# EAGLE board INA169_Breakout (EAGLE 6.5.0)
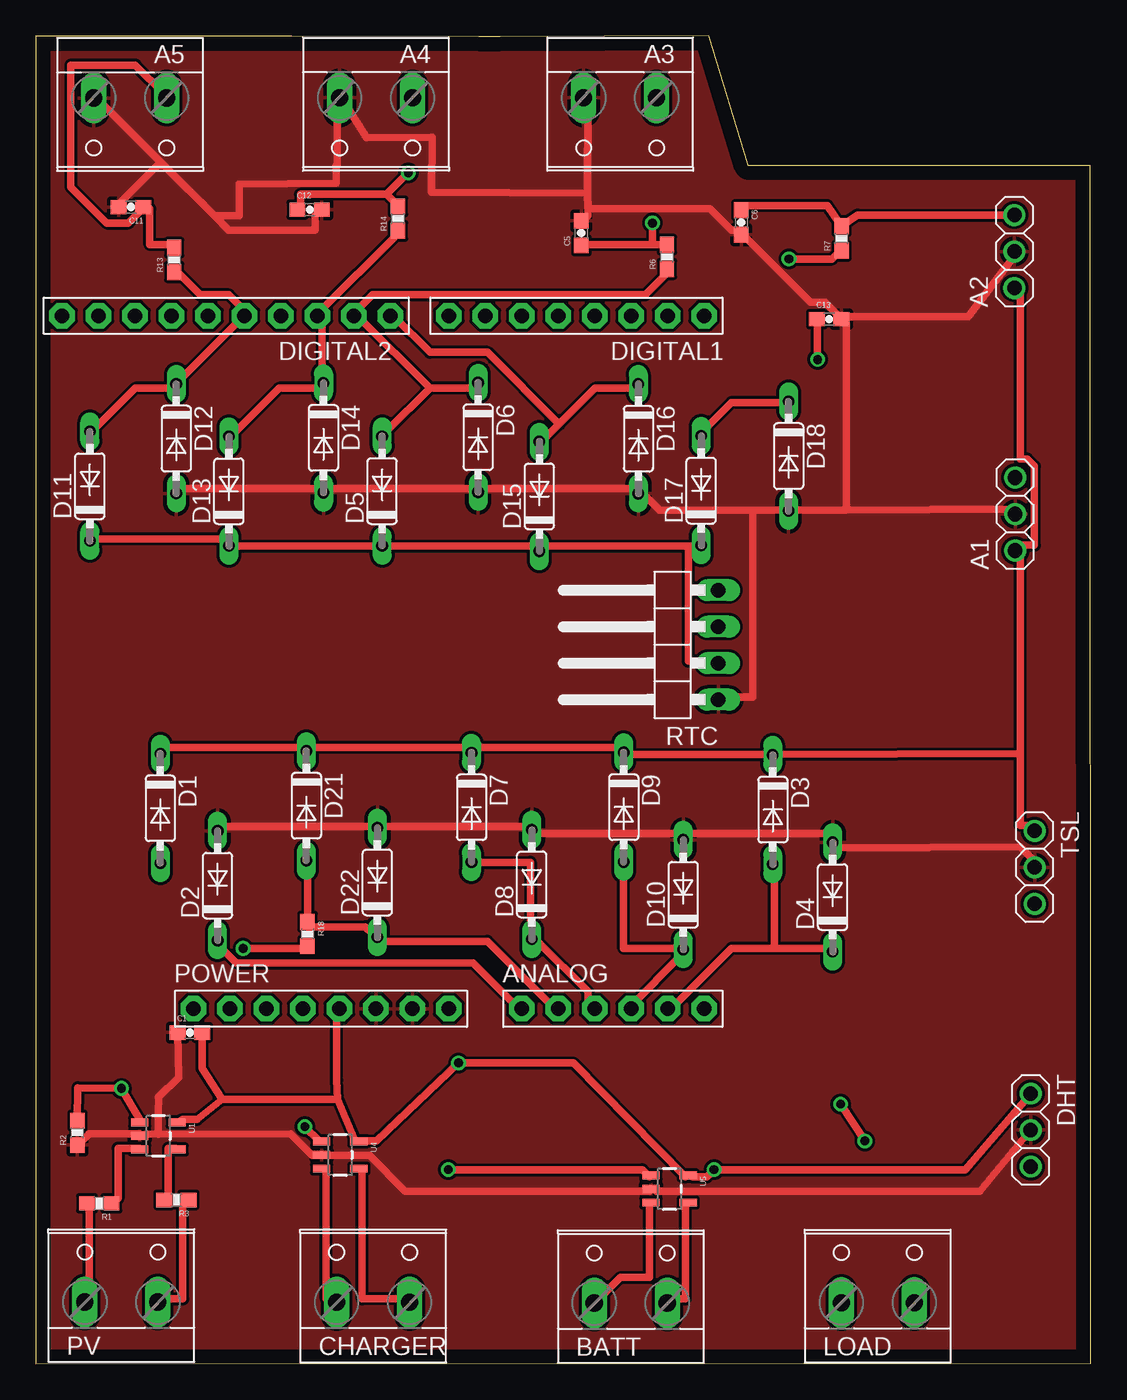
[diagram p0: board, top side]
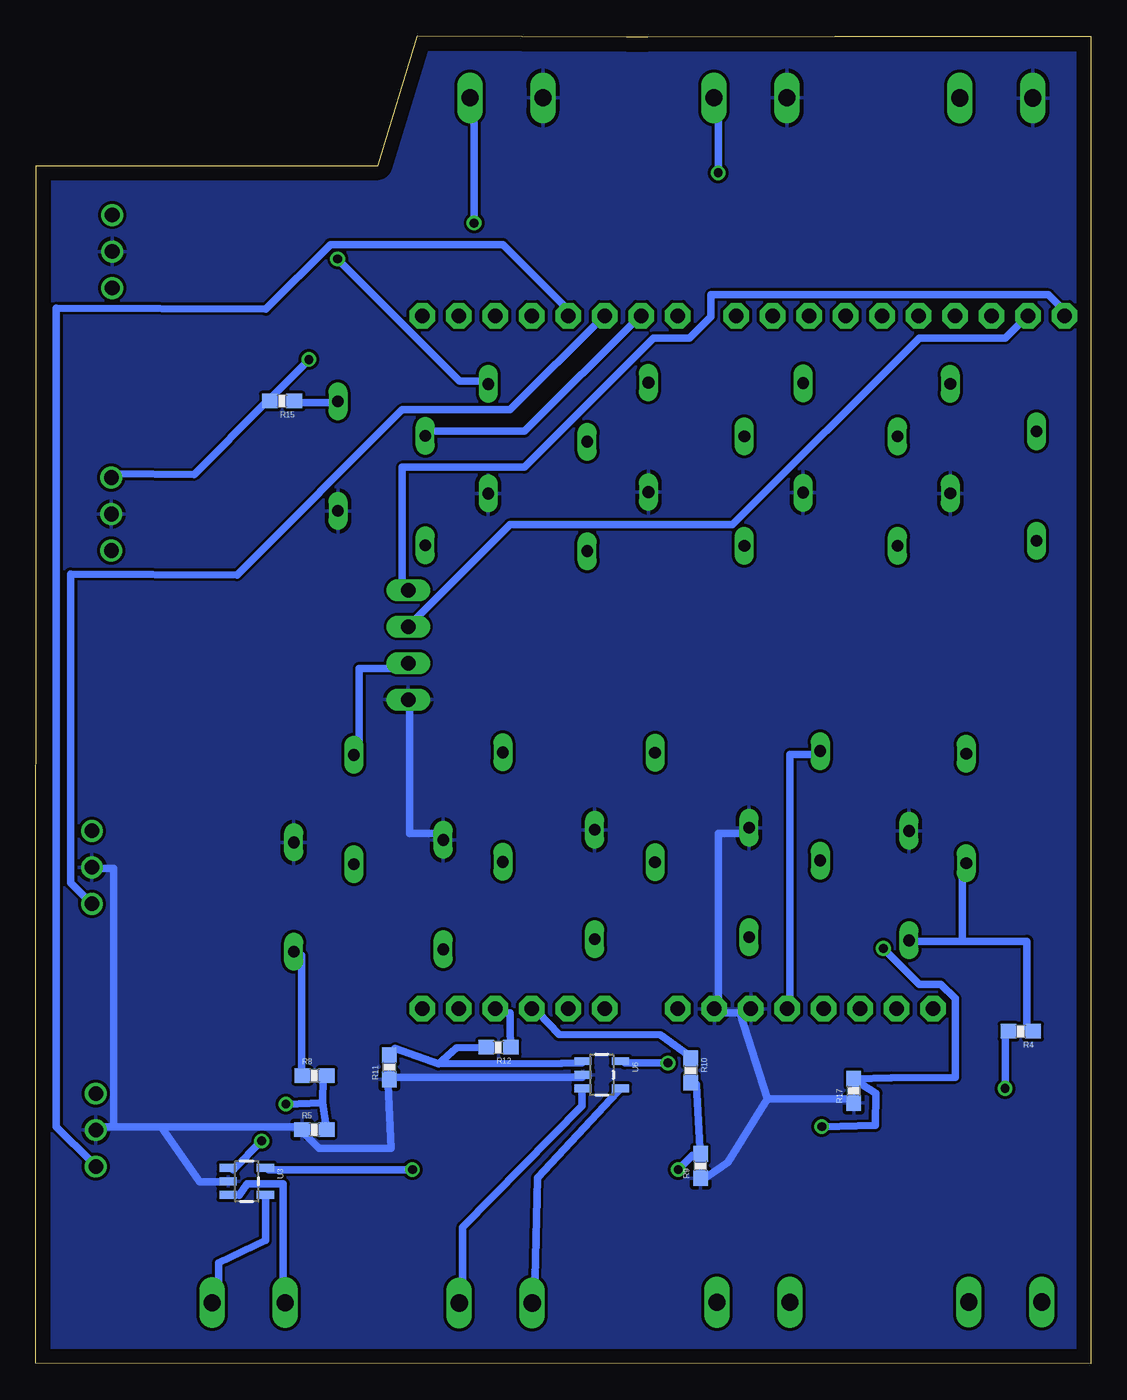
[diagram p1: board, bottom side, seen from below]

Size 73.44 x 92.44 mm. Coordinates in mm from the lower left corner, seen from the top.
Outline: 0,0 73.44,0.02 73.43,83.41 49.63,83.42 46.87,92.44 32.32,92.39 30.83,92.39 17.81,92.41 17.2,92.42 12.67,92.41 11.9,92.42 0,92.4 0,0
Copper layers (1*16): Top 0.035mm / dielectric 1.5mm / Bottom 0.035mm
Design rules "default *": minimum track width 20mil, minimum drill 24mil, track to track 8mil, track to pad 8mil, pad to pad 8mil, via to via 8mil, smd to smd 8mil, copper to edge 40mil, drill to drill 8mil, minimum pad ring 10mil, minimum via ring 8mil, stop-mask expansion 4mil, vias tented up to drill 0mil, thermal gap 10mil

## Footprints (pad centres in the part's own frame; a part is rotated, then mirrored left to right if it is on the bottom)
1X03 = drill 1.016: 1 -2.54,0; 2 0,0; 3 2.54,0
W237-132 = drill 1.194 long: 1 -2.54,-0.635; 2 2.54,-0.635
1X06-BIG = drill 1.016 pad 1.778 octagon: 1 -6.35,0; 2 -3.81,0; 3 -1.27,0; 4 1.27,0; 5 3.81,0; 6 6.35,0
0603-CAP = smd 1.1 x 1: 1 -0.85,0; 2 0.85,0
DO35-7 = drill 0.813 long: A 3.81,0; C -3.81,0
1X08-BIG = drill 1.016 pad 1.778 octagon: 1 -8.89,0; 2 -6.35,0; 3 -3.81,0; 4 -1.27,0; 5 1.27,0; 6 3.81,0; 7 6.35,0; 8 8.89,0
1X10-BIG = drill 1.016 pad 1.778 octagon: 1 -11.43,0; 2 -8.89,0; 3 -6.35,0; 4 -3.81,0; 5 -1.27,0; 6 1.27,0; 7 3.81,0; 8 6.35,0; 9 8.89,0; 10 11.43,0
0603-RES = smd 1.1 x 1: 1 -0.85,0; 2 0.85,0
1X04/90 = drill 1.016 long: 1 -3.81,-3.81; 2 -1.27,-3.81; 3 1.27,-3.81; 4 3.81,-3.81
SOT23-5 = smd 0.55 x 1.2: 1 -0.95,-1.3; 2 0,-1.3; 3 0.95,-1.3; 4 0.95,1.3; 5 -0.95,1.3

## Placement (x,y rotation side)
A1  [1X03]  68.19,59.15 90 top
A2  [1X03]  68.13,77.43 90 top
A3  [W237-132]  40.68,87.49 180 top
A4  [W237-132]  23.68,87.49 180 top
A5  [W237-132]  6.56,87.48 180 top
ANALOG  [1X06-BIG]  40.18,24.7 0 top
BATT  [W237-132]  41.42,4.85 0 top
C1  0.1uF  [0603-CAP]  10.72,23.05 0 top
C5  0.1uF  [0603-CAP]  37.98,78.71 90 top
C6  0.1uF  [0603-CAP]  49.11,79.46 270 top
C11  0.1uF  [0603-CAP]  6.61,80.52 180 top
C12  0.1uF  [0603-CAP]  19.06,80.34 0 top
C13  0.1uF  [0603-CAP]  55.23,72.72 0 top
CHARGER  [W237-132]  23.48,4.9 0 top
D1  1N4148DO35-7  [DO35-7]  8.66,38.66 270 top
D2  1N4148DO35-7  [DO35-7]  12.65,33.28 90 top
D3  1N4148DO35-7  [DO35-7]  51.31,38.57 270 top
D4  1N4148DO35-7  [DO35-7]  55.48,32.48 90 top
D5  1N4148DO35-7  [DO35-7]  24.11,60.75 90 top
D6  1N4148DO35-7  [DO35-7]  30.79,64.49 270 top
D7  1N4148DO35-7  [DO35-7]  30.33,38.73 270 top
D8  1N4148DO35-7  [DO35-7]  34.53,33.36 90 top
D9  1N4148DO35-7  [DO35-7]  40.93,38.74 270 top
D10  1N4148DO35-7  [DO35-7]  45.08,32.65 90 top
D11  1N4148DO35-7  [DO35-7]  3.76,61.09 90 top
D12  1N4148DO35-7  [DO35-7]  9.77,64.4 270 top
D13  1N4148DO35-7  [DO35-7]  13.44,60.74 90 top
D14  1N4148DO35-7  [DO35-7]  20.02,64.45 270 top
D15  1N4148DO35-7  [DO35-7]  35.06,60.38 90 top
D16  1N4148DO35-7  [DO35-7]  41.95,64.39 270 top
D17  1N4148DO35-7  [DO35-7]  46.33,60.78 90 top
D18  1N4148DO35-7  [DO35-7]  52.41,63.18 270 top
D21  1N4148DO35-7  [DO35-7]  18.83,38.84 270 top
D22  1N4148DO35-7  [DO35-7]  23.78,33.5 90 top
DHT  [1X03]  69.27,16.26 270 top
DIGITAL1  [1X08-BIG]  37.64,72.96 180 top
DIGITAL2  PINHD-1X10  [1X10-BIG]  13.25,72.96 180 top
LOAD  [W237-132]  58.62,4.88 0 top
POWER  [1X08-BIG]  19.86,24.7 0 top
PV  [W237-132]  5.95,4.92 0 top
R1  2K2  [0603-RES]  4.41,11.16 180 top
R2  [0603-RES]  2.89,16.07 90 top
R3  2K2  [0603-RES]  9.78,11.39 180 top
R4  1K  [0603-RES]  4.86,23.14 180 bottom
R5  [0603-RES]  54.05,16.29 0 bottom
R6  1K  [0603-RES]  43.94,77.06 90 top
R7  1K  [0603-RES]  56.1,78.34 90 top
R8  1K  [0603-RES]  54.04,20.05 0 bottom
R9  [0603-RES]  27.16,13.76 90 bottom
R10  1K  [0603-RES]  27.85,20.41 270 bottom
R11  [0603-RES]  48.82,20.63 90 bottom
R12  1K  [0603-RES]  41.23,22.03 180 bottom
R13  1K  [0603-RES]  9.63,76.85 90 top
R14  1K  [0603-RES]  25.21,79.72 90 top
R15  1K  [0603-RES]  56.3,67.02 180 bottom
R17  [0603-RES]  16.5,18.99 90 bottom
R18  1K  [0603-RES]  18.91,29.91 270 top
RTC  [1X04/90]  43.7,50.04 90 top
TSL  [1X03]  69.54,34.55 270 top
U1  INA169  [SOT23-5]  8.53,15.86 270 top
U3  INA169  [SOT23-5]  58.76,12.69 270 bottom
U4  INA169  [SOT23-5]  21.19,14.53 270 top
U5  INA169  [SOT23-5]  44.12,12.16 270 top
U6  INA169  [SOT23-5]  34.04,20.11 270 bottom

## Library data of the parts
A1 A2 ANALOG DHT DIGITAL1 DIGITAL2 POWER TSL = adafruit
A3-A5 BATT CHARGER LOAD PV = con-wago-508; OC_FARNELL: unknown; OC_NEWARK: unknown
C1 C5 C6 C11-C13 = SparkFun-Passives
D1-D18 D21 D22 = diode
R1-R15 R17 R18 = SparkFun-Resistors; TOL: 1%
RTC = pinhead
U1 U3-U6 = SparkFun-AnalogIC

## Nets
ADC1: A1.3 C13.1 R15.2
ADC2: A2.3 C6.1 R7.2
ADC3: A3.1 C5.1 R6.2
ADC4: A4.1 C12.1 R14.2
ADC5: A5.1 C11.1 R13.2
D1: DHT.3 DIGITAL1.5
D2: DIGITAL1.6 TSL.3
GND: A1.2 A2.2 A3.2 A4.2 A5.2 C1.1 C5.2 C6.2 C11.2 C12.2 C13.2 D2.A D4.A D6.A D8.A D10.A D12.A D14.A D16.A D18.A D22.A DHT.2 POWER.6 POWER.7 R2.1 R5.1 R9.1 R11.1 R17.1 RTC.1 TSL.2 U1.2 U3.2 U4.2 U5.2 U6.2
N$1: R3.2 U1.4
N$2: R1.1 U1.3
N$3: R2.2 R4.2 U1.1
N$4: R17.2 R18.2 U4.1
N$5: R9.2 R10.2 U5.1
N$6: R5.2 R8.2 U3.1
N$7: R11.2 R12.2 U6.1
SCL: DIGITAL2.10 RTC.4
SDA: DIGITAL2.9 RTC.3
SENS1: ANALOG.1 D1.A D2.C R4.1
SENS2: ANALOG.2 D21.A D22.C R18.1
SENS3: ANALOG.3 D7.A D8.C R10.1
SENS4: ANALOG.4 D9.A D10.C R12.1
SENS5: ANALOG.5 D3.A D4.C R8.1
SENS6: D17.A D18.C DIGITAL1.7 R15.1
SENS7: D15.A D16.C DIGITAL2.1 R7.1
SENS8: D5.A D6.C DIGITAL2.2 R6.1
SENS9: D13.A D14.C DIGITAL2.3 R14.1
SENS10: D11.A D12.C DIGITAL2.5 R13.1
VBATT+: BATT.1 U5.3 U6.4
VBATT-: BATT.2 U5.4 U6.3
VCC: A1.1 A2.1 C1.2 D1.C D3.C D5.C D7.C D9.C D11.C D13.C D15.C D17.C D21.C DHT.1 POWER.5 RTC.2 TSL.1 U1.5 U3.5 U4.5 U5.5 U6.5
VCHARGE+: CHARGER.1 U4.3
VCHARGE-: CHARGER.2 U4.4
VLOAD+: LOAD.1 U3.3
VLOAD-: LOAD.2 U3.4
VPV+: PV.1 R1.2
VPV-: PV.2 R3.1

## Tracks (layer width: path | path; a pad name or v marks a point on that pad's centre or on a via)
ADC1  (via drill 0.61)
  Top 0.508: v54.43,69.91 54.43,72.41 C13.1
  Bottom 0.508: A1.3 68.03,61.98 62.43,61.91 57.43,66.91 R15.2 56.93,67.41 v54.43,69.91
ADC2
  Top 0.508: C6.1 49.1,80.63 55.1,80.63 55.93,79.41 R7.2 57.2,79.97 67.44,79.95 A2.3
ADC3  (via drill 0.61)
  Top 0.508: R6.2 42.93,77.91 | 42.93,77.91 38.43,77.91 C5.1 | v42.93,79.41 42.93,77.91
  Bottom 0.508: v42.93,79.41 42.93,87.91 A3.1
ADC4  (via drill 0.61)
  Top 0.508: 24.43,81.41 18.43,81.41 18.43,80.41 C12.1 | 24.43,81.41 24.93,80.91 R14.2 | 24.43,81.41 v25.93,82.91
  Bottom 0.508: v25.93,82.91 25.93,87.91 A4.1
ADC5
  Top 0.508: R13.2 9.43,77.91 7.93,77.91 7.93,80.41 C11.1 7.43,80.41 6.43,79.41 4.93,79.41 2.43,81.91 2.43,90.41 6.93,90.41 8.93,88.41 A5.1
D1
  Bottom 0.508: DHT.3 69.53,14 72.03,16.5 72.03,73.48 57.43,73.41 52.93,77.91 40.93,77.91 36.43,73.41 DIGITAL1.5
D2
  Bottom 0.508: TSL.3 70.03,32.48 71.03,33.48 71.03,54.98 59.43,54.91 47.93,66.41 40.43,66.41 33.93,72.91 DIGITAL1.6
GND
  Top 0.508: D12.A 9.93,60.91 19.93,60.91 D14.A 20.43,60.91 30.43,60.91 D6.A 30.93,60.91 41.93,60.91 D16.A 42.43,60.41 43.43,59.41 49.93,59.41 | 49.93,59.41 51.93,59.41 D18.A 52.43,59.41 56.43,59.41 | 56.43,59.41 68.03,59.48 A1.2 | 8.93,83.41 4.43,87.91 A5.2 | 8.93,83.41 12.43,79.91 | 12.43,79.91 13.43,78.91 19.43,78.91 19.43,79.91 C12.2 | 8.93,83.41 8.43,83.41 5.93,80.91 C11.2 | 12.43,79.91 14.14,79.91 14.14,82.12 20.92,82.18 20.9,83.4 20.97,83.4 20.97,87.91 20.93,87.91 A4.2 21.43,87.91 23.01,85.36 27.59,85.4 27.55,81.56 38.42,81.5 | 38.42,81.5 38.43,87.91 A3.2 | 38.42,81.5 38.43,80.41 | 38.43,80.41 38.43,79.91 C5.2 | C13.2 55.93,72.91 54.93,73.91 53.93,73.91 49.43,78.41 C6.2 48.93,78.91 48.43,78.91 46.93,80.41 38.43,80.41 | A2.2 68.03,76.98 64.93,72.91 56.43,72.91 C13.2 | 56.43,59.41 56.43,72.41 C13.2 | R2.1 3.22,15.5 3.72,16 7.22,16 U1.2 7.72,16 8.51,15.97 | 8.51,15.97 8.53,17.46 8.54,18.57 8.53,18.55 9.93,19.93 C1.1 | 8.51,15.97 17.72,16 19.22,14.5 19.72,14.5 U4.2 20.22,14.5 23.22,14.5 25.72,12 42.72,12 U5.2 43.22,12 65.72,12 69.03,16 DHT.2 | D2.A 12.93,37.41 23.43,37.41 D22.A 23.93,37.41 34.43,37.41 D8.A 34.93,36.91 44.93,36.91 D10.A 45.43,36.91 54.93,36.91 55.43,36.41 D4.A 55.93,35.91 68.53,35.98 69.53,34.98 TSL.2 | 49.93,59.41 49.93,46.41 47.93,46.41 RTC.1
  Bottom 0.508: U6.2 35.43,19.93 48.43,19.93 R11.1 48.93,19.43 48.72,15 53.72,15 54.72,16 R5.1 55.22,16.5 64.72,16.5 | 68.03,16.5 69.03,16.5 DHT.2 | 68.03,16.5 64.72,16.5 | 64.72,16.5 62.03,12.65 60.56,12.65 U3.2 | 24.43,24.41 22.51,18.44 | 22.51,18.44 16.93,18.43 R17.1 | 24.43,24.41 25.93,24.41 POWER.7 25.93,24.91 25.93,36.91 23.93,36.91 D22.A | 22.51,18.44 25.27,14 26.72,13 R9.1 | 24.43,24.41 23.93,24.41 POWER.6 | RTC.1 47.43,45.91 47.43,36.91 45.43,36.91 D10.A | 68.03,16.5 68.03,34.48 69.53,34.48 TSL.2
  pour Bottom: 0.44,91.41 46.49,91.53 49.23,82.42 72.52,82.28 72.38,0.96 0.21,0.93
  pour Top: 0.42,91.41 46.43,91.51 49.27,82.48 72.49,82.34 72.36,0.98 0.24,0.99
N$1
  Top 0.508: R3.2 9.22,11.5 9.22,15 9.72,15 U1.4
N$2
  Top 0.508: R1.1 5.72,11.5 5.72,15 7.22,15 U1.3
N$3  (via drill 0.61)
  Top 0.508: R2.2 2.92,19.2 v5.95,19.16 7.22,17 U1.1
  Bottom 0.508: v5.95,19.16 5.93,22.93 R4.2
N$4  (via drill 0.61)
  Top 0.508: v18.72,16.5 19.72,15.5 U4.1 | v14.43,28.91 18.43,28.91 R18.2
  Bottom 0.508: v18.72,16.5 14.99,16.58 14.95,18.83 15.93,19.43 16.43,19.43 R17.2 13.87,19.89 9.43,19.93 9.43,25.41 10.43,26.41 11.93,26.41 v14.43,28.91
N$5  (via drill 0.61)
  Top 0.508: v28.72,13.5 42.22,13.5 42.72,13 U5.1
  Bottom 0.508: R10.2 27.43,19.43 27.22,15 R9.2 27.22,14.5 27.72,14.5 v28.72,13.5
N$6  (via drill 0.61)
  Top 0.508: v56.04,18.06 v57.72,15.5
  Bottom 0.508: 53.46,18.16 53.43,19.93 R8.2 | 53.46,18.16 53.22,16.5 R5.2 | v57.72,15.5 59.72,13.5 U3.1 | 53.46,18.16 v56.04,18.06
N$7
  Bottom 0.508: 45.41,20.86 44.16,21.98 R12.2 | 45.41,20.86 48.43,21.93 R11.2 | 45.41,20.86 36.83,20.89 35.43,20.93 U6.1
SCL
  Bottom 0.508: RTC.4 47.93,53.91 47.93,62.41 39.43,62.41 30.43,71.41 27.93,71.41 26.43,72.91 26.43,74.41 2.93,74.41 1.93,73.41 DIGITAL2.10
SDA
  Bottom 0.508: RTC.3 47.43,51.41 40.43,58.41 24.93,58.41 11.93,71.41 5.93,71.41 4.43,72.91 DIGITAL2.9
SENS1
  Top 0.508: ANALOG.1 33.43,24.91 30.43,27.91 13.93,27.91 12.43,29.41 D2.C
  Bottom 0.508: 8.93,29.41 12.43,29.41 D2.C | 8.93,29.41 4.43,29.41 4.43,23.43 R4.1 | 8.93,29.41 8.93,34.41 D1.A
SENS2
  Top 0.508: D21.A 18.93,34.91 18.93,30.91 R18.1 18.93,30.41 22.93,30.41 23.43,29.91 D22.C 23.93,29.41 31.43,29.41 35.93,24.91 ANALOG.2
SENS3
  Top 0.508: D7.A 30.43,34.91 34.43,34.91 34.43,29.91 D8.C 34.93,29.41 38.43,25.91 38.43,24.91 ANALOG.3
  Bottom 0.508: R10.1 27.93,21.43 29.94,22.87 37.03,22.91 38.43,24.41 ANALOG.3
SENS4
  Top 0.508: ANALOG.4 41.43,24.91 44.93,28.41 D10.C 44.93,28.91 40.93,28.91 D9.A
  Bottom 0.508: R12.1 40.43,23.43 40.43,24.41 41.43,24.41 ANALOG.4
SENS5
  Top 0.508: 51.43,28.91 51.43,34.41 D3.A | 51.43,28.91 55.43,28.91 D4.C | 51.43,28.91 48.43,28.91 44.43,24.91 ANALOG.5
  Bottom 0.508: R8.1 54.93,20.43 54.93,28.41 55.43,28.41 D4.C
SENS6
  Top 0.508: D17.A 46.43,64.91 48.43,66.91 51.93,66.91 D18.C
  Bottom 0.508: R15.1 55.43,66.91 52.43,66.91 D18.C | DIGITAL1.7 31.43,72.91 39.43,64.91 45.93,64.91 D17.A
SENS7  (via drill 0.61)
  Top 0.508: v52.43,76.91 55.43,76.91 55.93,77.41 R7.1 | 36.43,65.41 38.93,67.91 41.93,67.91 D16.C | 36.43,65.41 35.43,64.41 D15.A | 36.43,65.41 31.43,70.41 27.43,70.41 24.93,72.91 DIGITAL2.1
  Bottom 0.508: v52.43,76.91 43.93,68.41 42.43,68.41 D16.C
SENS8
  Top 0.508: 27.43,67.91 24.43,64.91 D5.A | 27.43,67.91 30.43,67.91 D6.C | R6.1 43.93,75.91 42.43,74.41 23.43,74.41 22.43,73.41 DIGITAL2.2 22.43,72.91 27.43,67.91
SENS9
  Top 0.508: D13.A 13.93,64.91 16.93,67.91 19.93,67.91 D14.C 19.93,68.41 19.93,72.91 DIGITAL2.3 19.93,73.41 24.93,78.41 R14.1
SENS10
  Top 0.508: R13.1 9.93,75.91 11.43,74.41 13.43,74.41 14.43,73.41 DIGITAL2.5 14.43,72.91 9.93,68.41 D12.C 9.43,67.91 6.93,67.91 3.93,64.91 D11.A
VBATT+
  Top 0.508: U5.3 42.72,11 42.72,6 40.72,6 39.22,4.5 BATT.1
  Bottom 0.508: U6.4 32.93,18.93 38.52,12.92 38.72,4.5 BATT.1
VBATT-
  Top 0.508: U5.4 45.22,11 45.22,4.5 44.22,4.5 BATT.2
  Bottom 0.508: U6.3 35.43,18.93 35.43,17.93 43.72,9.5 43.72,4.5 BATT.2
VCC  (via drill 0.61)
  Top 0.508: 12.97,18.4 11.22,17 10.22,17 U1.5 | 12.97,18.4 11.57,20.55 C1.2 | 21.01,18.41 22.22,15.5 U4.5 22.72,15.5 23.72,15.5 v29.43,20.93 37.43,20.93 45.22,13 U5.5 45.72,13 46.72,13 v47.22,13.5 64.72,13.5 69.03,18.5 DHT.1 | 12.97,18.4 21.01,18.41 | 21.01,18.41 20.94,19.75 20.93,24.41 POWER.5 | D11.C 3.93,57.41 13.43,57.41 D13.C 13.93,56.91 23.93,56.91 D5.C 24.43,56.91 34.93,56.91 D15.C 35.43,56.91 45.43,56.91 | 45.43,56.91 45.93,56.91 D17.C | 68.53,42.48 68.53,37.48 69.53,37.48 TSL.1 | 68.53,42.48 68.53,56.48 A1.1 68.53,56.98 69.53,56.98 69.53,62.48 69.03,62.98 68.53,62.98 68.53,74.48 A2.1 | D1.C 8.93,42.91 18.43,42.91 D21.C 18.93,42.91 29.93,42.91 D7.C 30.43,42.91 40.93,42.91 D9.C 40.93,42.41 50.93,42.41 D3.C 51.43,42.41 68.53,42.48 | 45.43,56.91 45.43,48.91 47.43,48.91 RTC.2
  Bottom 0.508: v29.43,20.93 32.43,20.93 U6.5 | v47.22,13.5 57.22,13.5 U3.5 | D3.C 50.93,42.41 50.93,48.41 47.93,48.41 RTC.2 | POWER.5 20.93,24.91 20.93,42.41 18.93,42.41 D21.C
VCHARGE+
  Top 0.508: U4.3 20.22,13.5 20.22,4.5 20.72,4.5 CHARGER.1
VCHARGE-
  Top 0.508: U4.4 22.72,13.5 22.72,4.5 25.72,4.5 CHARGER.2
VLOAD+
  Bottom 0.508: U3.3 59.3,11.72 58.72,12.5 56.22,12.5 56.22,4.5 LOAD.1
VLOAD-
  Bottom 0.508: U3.4 57.45,8.57 60.72,7.01 60.72,4.5 LOAD.2
VPV+
  Top 0.508: R1.2 3.72,11 3.72,4.5 PV.1
VPV-
  Top 0.508: R3.1 10.22,11 10.22,4.5 8.72,4.5 PV.2